# EAGLE board Syn-ArduinoShield-v1a (EAGLE 5.10)
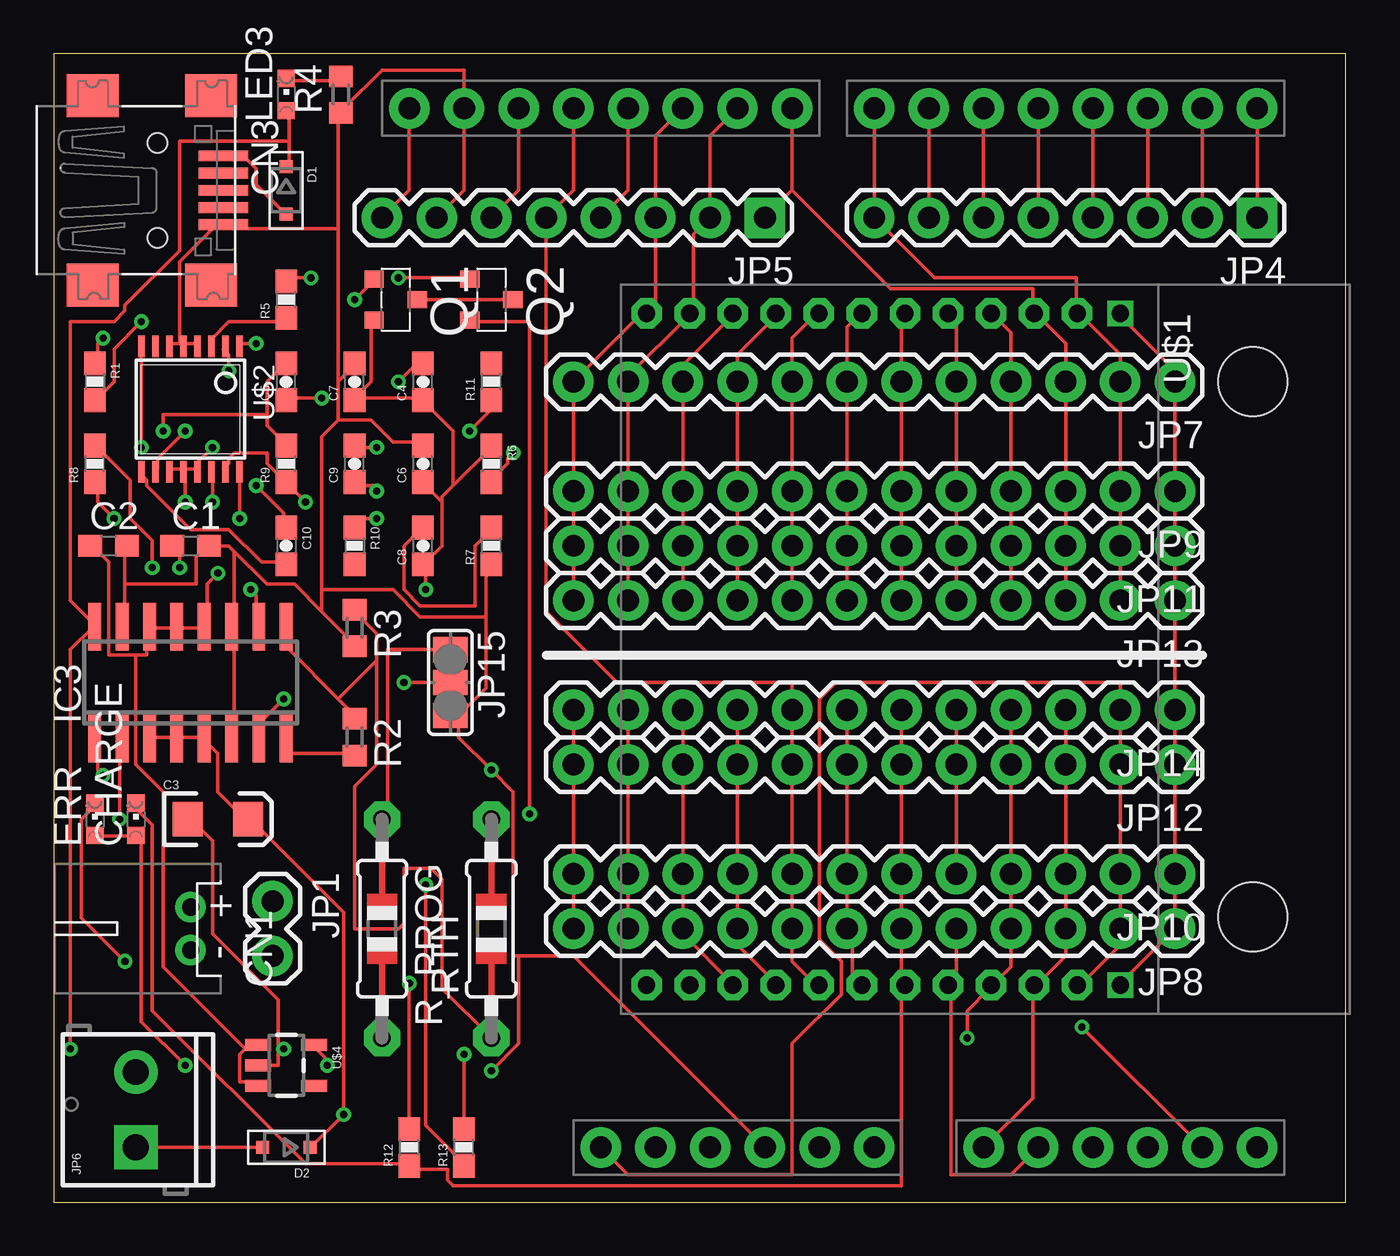
[diagram p0: board, top side]
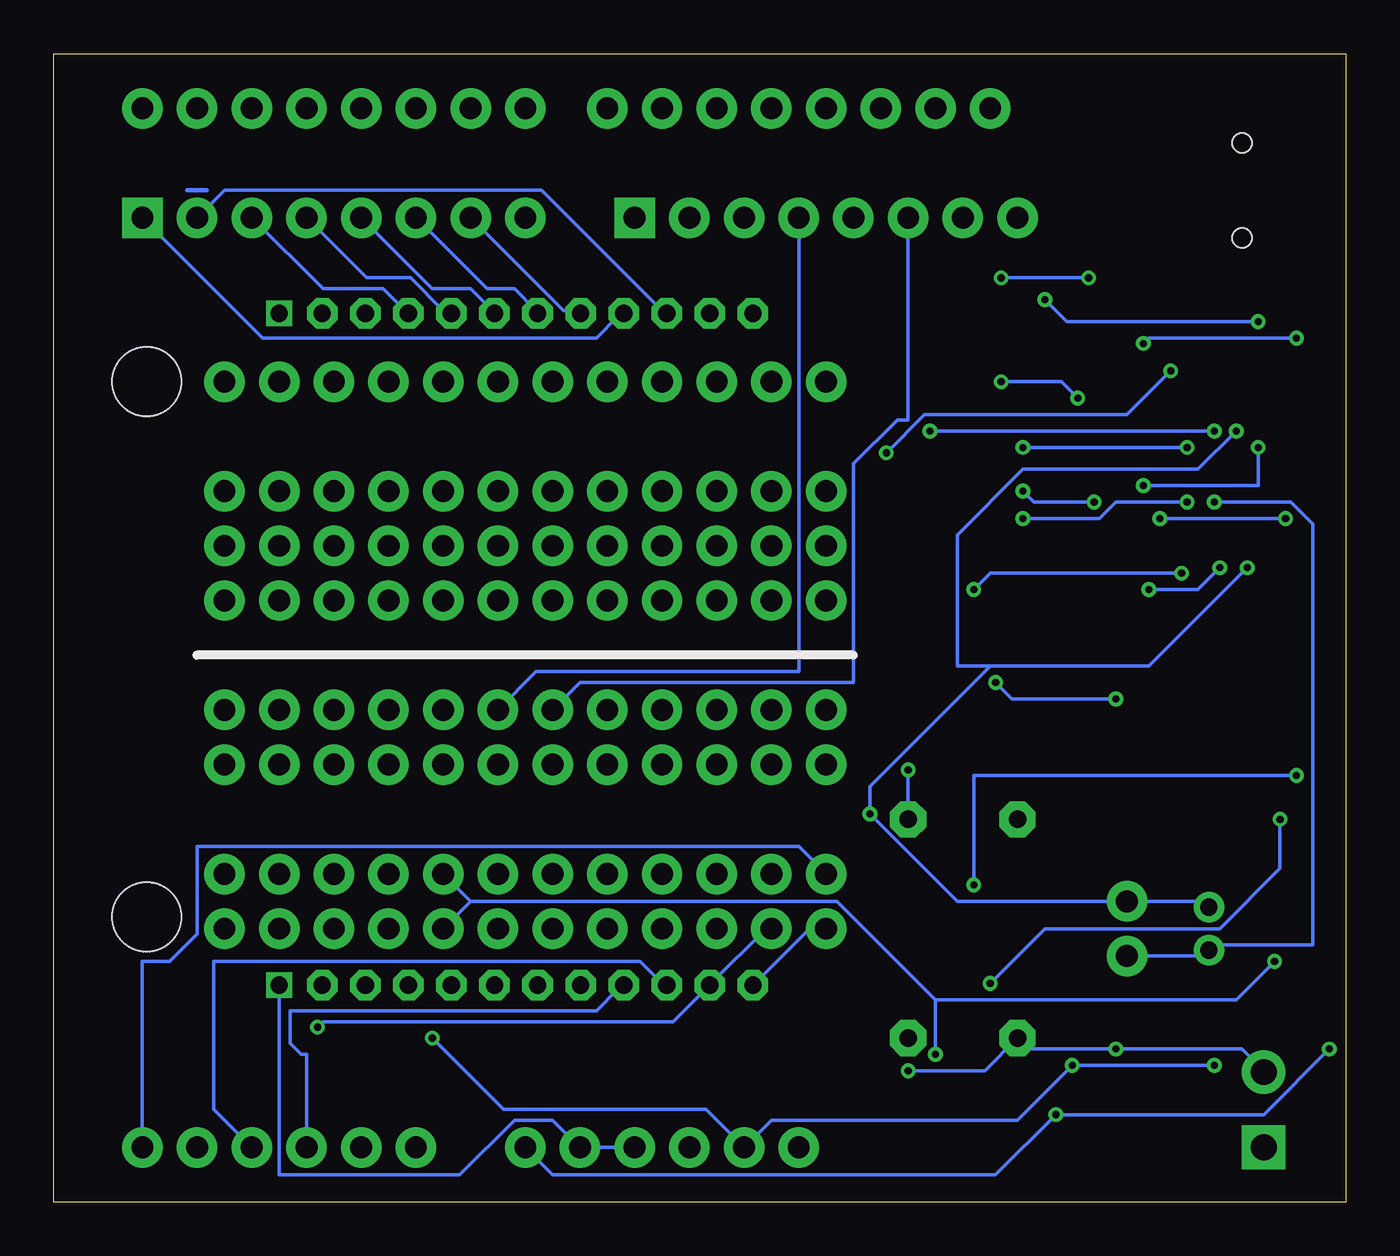
[diagram p1: board, bottom side, seen from below]

Size 59.99 x 53.33 mm. Coordinates in mm from the lower left corner, seen from the top.
Outline: 0,0 59.99,0 59.99,53.33 0,53.33 0,0
Copper layers (1*16): Top 0.0356mm / dielectric 1.5011mm / Bottom 0.0356mm
Design rules "LaenPCBOrder": minimum track width 6mil, minimum drill 13mil, track to track 6mil, track to pad 6mil, pad to pad 6mil, via to via 6mil, smd to smd 6mil, copper to edge 15mil, drill to drill 6mil, minimum pad ring 7mil, minimum via ring 7mil, stop-mask expansion 4mil, vias tented up to drill 0mil, thermal gap 10mil

## Footprints (pad centres in the part's own frame; a part is rotated, then mirrored left to right if it is on the bottom)
C0603 = smd 1.1 x 1: 1 -0.85,0; 2 0.85,0
EIA3216 = smd 1.4 x 1.6: A 1.4,0; C -1.4,0
0603-CAP = smd 1.1 x 1: 1 -0.85,0; 2 0.85,0
CHIPLED_0603 = smd 0.8 x 0.8: A 0,-0.75; C 0,0.75
JST-PH-2-THM-RA = drill 0.8 pad 1.422 round: 1 1,0; 2 -1,0
USB-MINIB = smd 0.5 x 2.308: D+ 0,4.064; D- -0.8,4.064; GND 1.6,4.064; ID 0.8,4.064; VBUS -1.6,4.064 | smd 2 x 2.4: GND1 -4.4,-2; GND2 -4.4,3.5; GND3 4.4,3.5; GND4 4.4,-2 | hole 0.9: -2.2,1; 2.2,1
SOD-323 = smd 0.6 x 0.6: A 1.1,0; C -1.1,0
SO16 = smd 0.6 x 2.2: 1 -4.445,-2.6; 2 -3.175,-2.6; 3 -1.905,-2.6; 4 -0.635,-2.6; 5 0.635,-2.6; 6 1.905,-2.6; 7 3.175,-2.6; 8 4.445,-2.6; 9 4.445,2.6; 10 3.175,2.6; 11 1.905,2.6; 12 0.635,2.6; 13 -0.635,2.6; 14 -1.905,2.6; 15 -3.175,2.6; 16 -4.445,2.6
1X02 = drill 1.016 pad 1.88 round: 1 0,0; 2 2.54,0
1X08 = drill 1.016 pad 1.88 square: 1 0,0 | drill 1.016 pad 1.88 round: 2 2.54,0; 3 5.08,0; 4 7.62,0; 5 10.16,0; 6 12.7,0; 7 15.24,0; 8 17.78,0
SCREWTERMINAL-3.5MM-2 = drill 1.2 pad 2.032 square: 1 0,0 | drill 1.2 pad 2.032 round: 2 3.5,0
1X12 = drill 1.016 pad 1.88 round: 1 0,0; 2 2.54,0; 3 5.08,0; 4 7.62,0; 5 10.16,0; 6 12.7,0; 7 15.24,0; 8 17.78,0; 9 20.32,0; 10 22.86,0; 11 25.4,0; 12 27.94,0
SJ_2 = smd 1.168 x 1.6: 1 -1.524,0; 2 0,0; 3 1.524,0
MICRO3 = smd 0.8 x 0.9: 1 -0.95,-1; 2 0.95,-1; 3 0,1
0603-RES = smd 1.1 x 1: 1 -0.85,0; 2 0.85,0
R0603 = smd 1 x 1.1: 1 -0.85,0; 2 0.85,0
0805-THM = drill 0.813 pad 1.676 octagon: 1 -5.08,0; 2 5.08,0
DUEMILANOVE_VIAS = drill 1.016 pad 1.88 round: 3.3V 50.8,13.97; 5V 50.8,16.51; A0 50.8,29.21; A1 50.8,31.75; A2 50.8,34.29; A3 50.8,36.83; A4 50.8,39.37; A5 50.8,41.91; AREF 2.54,2.54; D2 2.54,36.83; D3 2.54,34.29; D4 2.54,31.75; D5 2.54,29.21; D6 2.54,26.67; D7 2.54,24.13; D8 2.54,20.32; D9 2.54,17.78; D10 2.54,15.24; D11 2.54,12.7; D12 2.54,10.16; D13 2.54,7.62; GND@0 50.8,19.05; GND@1 50.8,21.59; GND@2 2.54,5.08; RES 50.8,11.43; RX 2.54,41.91; TX 2.54,39.37; VIN 50.8,24.13
SYNAPSERF100 = drill 0.8 square: 1 0,0; 24 31.2,0 | drill 0.8 pad 1.422 octagon: 2 0,-2; 3 0,-4; 4 0,-6; 5 0,-8; 6 0,-10; 7 0,-12; 8 0,-14; 9 0,-16; 10 0,-18; 11 0,-20; 12 0,-22; 13 31.2,-22; 14 31.2,-20; 15 31.2,-18; 16 31.2,-16; 17 31.2,-14; 18 31.2,-12; 19 31.2,-10; 20 31.2,-8; 21 31.2,-6; 22 31.2,-4; 23 31.2,-2 | hole 3.2: 3.17,6.16; 28.03,6.16
DS2764 = smd 0.305 x 0.991: CC -2.275,-2.918; DC -0.975,-2.918; IS1 2.275,2.918; IS2 2.275,-2.918; PLS -1.625,-2.918; PS 1.625,-2.918; SCL -0.975,2.918; SDA 1.625,2.918; SNS -0.325,-2.918; SNS1 0.325,-2.918; SNS2 0.975,-2.918; VDD -1.625,2.918; VIN -2.275,2.918; VSS -0.325,2.918; VSS1 0.325,2.918; VSS2 0.975,2.918
SOT23-5 = smd 0.55 x 1.2: 1 -0.95,-1.3; 2 0,-1.3; 3 0.95,-1.3; 4 0.95,1.3; 5 -0.95,1.3

## Placement (x,y rotation side)
C1  0.47uF  [C0603]  6.35,30.48 0 top
C2  10uF  [C0603]  2.54,30.48 0 top
C3  10uF  [EIA3216]  7.62,17.78 0 top
C4  1000pF  [0603-CAP]  17.14,38.1 90 top
C5  1000pF  [0603-CAP]  10.79,38.1 90 top
C6  1000pF  [0603-CAP]  17.14,34.29 90 top
C7  1uF  [0603-CAP]  13.97,38.1 90 top
C8  4.7uF  [0603-CAP]  17.14,30.48 90 top
C9  0.1uF  [0603-CAP]  13.97,34.29 90 top
C10  0.1uF  [0603-CAP]  10.79,30.48 270 top
CHARGE  ORG  [CHIPLED_0603]  3.81,17.78 0 top
CN1  [JST-PH-2-THM-RA]  6.35,12.7 90 top
CN3  [USB-MINIB]  3.81,46.99 270 top
D1  [SOD-323]  10.79,46.99 270 top
D2  [SOD-323]  10.79,2.54 180 top
ERR  RED  [CHIPLED_0603]  1.91,17.78 0 top
IC3  [SO16]  6.35,24.13 0 top
JP1  [1X02]  10.16,13.97 270 top
JP4  [1X08]  55.88,45.72 180 top
JP5  [1X08]  33.02,45.72 180 top
JP6  [SCREWTERMINAL-3.5MM-2]  3.81,2.54 90 top
JP7  M12PTH  [1X12]  52.07,38.1 180 top
JP8  M12PTH  [1X12]  52.07,12.7 180 top
JP9  M12PTH  [1X12]  52.07,33.02 180 top
JP10  M12PTH  [1X12]  52.07,15.24 180 top
JP11  M12PTH  [1X12]  52.07,30.48 180 top
JP12  M12PTH  [1X12]  52.07,20.32 180 top
JP13  M12PTH  [1X12]  52.07,27.94 180 top
JP14  M12PTH  [1X12]  52.07,22.86 180 top
JP15  [SJ_2]  18.41,24.13 270 top
LED3  [CHIPLED_0603]  10.79,51.44 0 top
Q1  IRLML6401  [MICRO3]  15.88,41.91 270 top
Q2  IRLML6401  [MICRO3]  20.32,41.91 270 top
R1  1K  [0603-RES]  1.91,38.1 270 top
R2  6.19K  [R0603]  13.97,21.59 270 top
R3  7.3K  [R0603]  13.97,26.67 270 top
R4  1K  [R0603]  13.34,51.44 90 top
R5  1K  [0603-RES]  10.79,41.91 90 top
R6  150  [0603-RES]  20.32,34.29 270 top
R7  1  [0603-RES]  20.32,30.48 90 top
R8  [0603-RES]  1.91,34.29 90 top
R9  [0603-RES]  10.79,34.29 90 top
R10  150  [0603-RES]  13.97,30.48 270 top
R11  150  [0603-RES]  20.32,38.1 90 top
R12  330  [0603-RES]  16.51,2.54 90 top
R13  330  [0603-RES]  19.05,2.54 90 top
R_PROG  [0805-THM]  15.24,12.7 270 top
RTH  10K @ 25degC  [0805-THM]  20.32,12.7 90 top
U1  ARDUINO_SHIELDNO_SILK  [DUEMILANOVE_VIAS]  13.97,53.34 270 top
U$1  SYNAPSEWIRELESS-RFENGINESTD  [SYNAPSERF100]  49.53,41.27 270 top
U$2  DS2764  [DS2764]  6.35,36.83 180 top
U$4  MCP1802  [SOT23-5]  10.79,6.35 270 top

## Library data of the parts
C1 C2 CHARGE CN1 CN3 D1 D2 ERR IC3 LED3 R2-R4 R_PROG RTH = adafruit
C3-C10 JP1 JP4-JP15 R1 R5-R13 U1 = SparkFun
Q1 Q2 = transistor-power
U$1 = 0_jc-custom
U$2 = ssozonoff
U$4 = 0_jc-modified

## Nets
ADC0: JP8.3 JP10.3 JP12.3 JP14.3 U1.A0 U$1.22
ADC1: ERR.C JP8.5 JP10.5 JP12.5 JP14.5 R13.2 U1.A1 U$1.20
ADC2: JP8.9 JP10.9 JP12.9 JP14.9 U1.A2 U$1.16
ADC3: JP8.10 JP10.10 JP12.10 JP14.10 U1.A3 U$1.15
ADC4: JP8.11 JP10.11 JP12.11 JP14.11 U1.A4 U$1.14
ADC5: JP8.12 JP10.12 JP12.12 JP14.12 U1.A5 U$1.13
AREF: JP5.8 U1.AREF
ARX: JP4.1 JP7.9 JP9.9 JP11.9 JP13.9 U1.RX U$1.9
ATX: JP4.2 JP7.10 JP9.10 JP11.10 JP13.10 U1.TX U$1.10
BAT+: C5.2 CN1.1 JP1.1 Q2.2 R8.2 R9.2
BAT-: C9.2 CN1.2 JP1.2 U$2.VSS U$2.VSS1 U$2.VSS2
D2: JP4.3 JP7.4 JP9.4 JP11.4 JP13.4 U1.D2 U$1.4
D3: JP4.4 JP7.5 JP9.5 JP11.5 JP13.5 U1.D3 U$1.5
D4: JP4.5 JP7.6 JP9.6 JP11.6 JP13.6 U1.D4 U$1.6
D5: JP4.6 JP7.7 JP9.7 JP11.7 JP13.7 U1.D5 U$1.7
D6: JP4.7 JP7.8 JP9.8 JP11.8 JP13.8 U1.D6 U$1.8
D7: JP4.8 JP7.2 JP9.2 JP11.2 JP13.2 U1.D7 U$1.2
D8: JP5.1 JP7.3 JP9.3 JP11.3 JP13.3 U1.D8 U$1.3
D9: JP5.2 JP7.11 JP9.11 JP11.11 JP13.11 U1.D9 U$1.11
D10: JP5.3 JP7.12 JP9.12 JP11.12 JP13.12 U1.D10 U$1.12
D11: CHARGE.C JP5.4 JP8.6 JP10.6 JP12.6 JP14.6 R12.1 U1.D11 U$1.19
D12: JP5.5 JP8.8 JP10.8 JP12.8 JP14.8 U1.D12 U$1.17
D13: JP5.6 JP8.7 JP10.7 JP12.7 JP14.7 U1.D13 U$1.18
GND: C1.2 C2.2 C3.C C6.2 C7.2 CN3.GND IC3.6 IC3.11 IC3.15 JP5.7 JP6.2 JP7.1 JP8.1 JP9.1 JP10.1 JP11.1 JP12.1 JP13.1 JP14.1 JP15.3 R3.2 R4.1 R7.1 R_PROG.2 RTH.2 U1.GND@0 U1.GND@1 U1.GND@2 U$1.1 U$1.24 U$2.SNS U$2.SNS1 U$2.SNS2 U$4.2
I2C_SCL: R10.2
I2C_SDA: R11.2
MPROG: IC3.7 JP15.2
N$1: IC3.1 R13.1
N$2: LED3.C R4.2
N$3: Q1.1 R1.2
N$4: Q2.1 R5.2
N$5: IC3.2 R12.2
N$6: R11.1 U$2.SDA
N$7: IC3.8 R2.2
N$8: IC3.9 R2.1 R3.1 RTH.1
N$9: C1.1 IC3.10
N$10: C4.2 C5.1
N$11: JP15.1 R_PROG.1
N$12: R1.1 U$2.CC
N$14: R5.1 U$2.DC
N$15: C8.2 R7.2
N$16: R8.1 U$2.VIN
N$17: C9.1 R9.1 U$2.VDD
N$18: Q1.3 Q2.3
N$19: C10.1 U$2.IS2
N$20: R10.1 U$2.SCL
N$21: CN3.VBUS D1.A
N$22: C10.2 U$2.IS1
N$24: R6.2 U$2.PLS
N$55: U1.5V
POWER_SWITCH: U$2.PS
RESET: JP8.2 JP10.2 JP12.2 JP14.2 U1.RES U$1.23
VBAT+: C2.1 C4.1 C6.1 C7.1 C8.1 IC3.12 IC3.13 IC3.14 Q1.2 R6.1 U$4.1 U$4.3
VCC3: CHARGE.A ERR.A JP8.4 JP10.4 JP12.4 JP14.4 U1.3.3V U$1.21 U$4.5
VIN: C3.A D1.C D2.C IC3.3 IC3.4 IC3.5 IC3.16 LED3.A U1.VIN
VINJ: D2.A JP6.1

## Tracks (layer width: path | path; a pad name or v marks a point on that pad's centre or on a via)
ADC0
  Top 0.152: JP14.3 JP12.3 JP10.3 JP8.3 46.99,11.43 45.72,10.16 U$1.22 45.47,9.91 45.47,4.83 U1.A0
ADC1  (via drill 0.33)
  Top 0.152: JP8.5 41.91,10.41 41.66,10.16 U$1.20 41.66,9.91 41.66,1.27 44.45,1.27 U1.A1 | JP14.5 JP12.5 JP10.5 | v3.3,11.18 1.27,13.21 1.27,17.78 1.78,18.29 ERR.C | v19.05,6.86 R13.2
  Bottom 0.152: v3.3,11.18 5.08,9.4 19.05,9.4 | 19.05,9.4 23.62,13.97 40.64,13.97 | 40.64,13.97 JP10.5 | 19.05,9.4 v19.05,6.86 | 40.64,13.97 JP8.5
ADC2
  Top 0.152: JP14.9 JP12.9 JP10.9 JP8.9 31.75,11.94 33.53,10.16 U$1.16
  Bottom 0.152: U1.A2 48.26,6.86 48.51,6.86 49.02,7.37 49.02,8.89 34.8,8.89 33.78,9.91 U$1.16
ADC3
  Top 0.152: JP14.10 JP12.10 JP10.10 JP8.10 29.21,12.45 31.5,10.16 U$1.15
  Bottom 0.152: U1.A3 52.58,4.32 52.58,11.18 32.77,11.18 31.75,10.16 U$1.15
ADC4  (via drill 0.33)
  Top 0.152: JP14.11 JP12.11 JP10.11 JP8.11 | v47.75,8.13 U1.A4
  Bottom 0.152: JP8.11 26.92,12.7 29.46,10.16 U$1.14 29.72,9.91 31.24,8.38 47.5,8.38 v47.75,8.13
ADC5
  Top 0.152: JP14.12 JP12.12 JP10.12 JP8.12
  Bottom 0.152: JP8.12 24.89,12.7 27.43,10.16 U$1.13 | U1.A5 55.88,11.18 54.61,11.18 53.34,12.45 53.34,16.51 25.4,16.51 JP10.12
AREF
  Top 0.152: JP5.8 16.51,46.99 U1.AREF
ARX
  Top 0.152: JP4.1 U1.RX | U$1.9 33.53,41.15 31.75,39.37 JP7.9 JP9.9 JP11.9 JP13.9
  Bottom 0.152: JP4.1 50.29,40.13 34.8,40.13 33.78,41.15 U$1.9
ATX
  Top 0.152: JP4.2 U1.TX | U$1.10 31.5,41.15 29.21,38.86 JP7.10 JP9.10 JP11.10 JP13.10
  Bottom 0.152: JP4.2 52.07,46.99 37.34,46.99 31.75,41.4 U$1.10
BAT+  (via drill 0.33)
  Top 0.152: 9.91,36.58 9.91,38.1 10.67,38.86 C5.2 | 9.91,36.58 9.91,36.07 10.67,35.31 R9.2 | v22.1,18.03 22.1,40.89 19.56,40.89 Q2.2 | v4.57,29.46 4.57,30.73 3.56,31.75 3.56,33.53 2.03,35.05 R8.2 | 9.91,36.58 5.08,36.58 v5.08,35.81
  Bottom 0.152: v4.57,29.46 9.14,24.89 16.51,24.89 | 16.51,24.89 22.1,19.3 v22.1,18.03 18.03,13.97 JP1.1 6.6,13.97 6.35,13.72 CN1.1 | v5.08,35.81 6.86,34.04 14.99,34.04 18.03,30.99 18.03,24.89 16.51,24.89
BAT-  (via drill 0.33)
  Top 0.152: 6.1,34.04 5.33,34.04 U$2.VSS2 | 6.1,34.04 6.6,34.04 | 6.1,34.04 U$2.VSS1 6.1,33.78 v6.1,32.51 | v14.99,35.05 13.97,35.05 C9.2 | v7.37,35.05 6.6,34.29 6.6,34.04 | 6.6,34.04 U$2.VSS
  Bottom 0.152: v7.37,35.05 v14.99,35.05 | JP1.2 6.6,11.43 6.35,11.68 CN1.2 6.35,11.94 1.52,11.94 1.52,31.5 2.54,32.51 v6.1,32.51
D2
  Top 0.152: JP4.3 U1.D2 | U$1.4 43.69,41.15 44.45,40.39 JP7.4 JP9.4 JP11.4 JP13.4
  Bottom 0.152: JP4.3 47.5,42.42 44.7,42.42 43.69,41.4 U$1.4
D3
  Top 0.152: JP4.4 U1.D3 | U$1.5 41.66,41.15 41.91,40.89 JP7.5 JP9.5 JP11.5 JP13.5
  Bottom 0.152: JP4.4 45.47,42.93 43.43,42.93 41.91,41.4 41.66,41.4 U$1.5
D4
  Top 0.152: JP4.5 U1.D4 | U$1.6 39.37,41.15 JP7.6 JP9.6 JP11.6 JP13.6
  Bottom 0.152: JP4.5 42.42,42.42 40.64,42.42 39.62,41.4 U$1.6
D5
  Top 0.152: JP4.6 U1.D5 | U$1.7 37.34,41.15 36.83,40.64 JP7.7 JP9.7 JP11.7 JP13.7
  Bottom 0.152: JP4.6 39.88,42.42 38.61,42.42 37.59,41.4 U$1.7
D6
  Top 0.152: JP4.7 U1.D6 | U$1.8 35.31,41.15 34.29,40.13 JP7.8 JP9.8 JP11.8 JP13.8
  Bottom 0.152: JP4.7 36.32,41.4 35.56,41.4 U$1.8
D7
  Top 0.152: U1.D7 JP4.8 40.89,42.93 47.5,42.93 47.5,41.4 U$1.2 47.75,41.15 49.53,39.37 JP7.2 JP9.2 JP11.2 JP13.2
D8
  Top 0.152: 34.29,46.99 JP5.1 | 34.29,46.99 U1.D8 | JP13.3 JP11.3 JP9.3 JP7.3 46.99,39.88 45.72,41.15 U$1.3 45.47,41.4 45.47,42.42 38.86,42.42 34.29,46.99
D9
  Top 0.152: JP13.11 JP11.11 JP9.11 JP7.11 26.67,38.35 29.46,41.15 U$1.11 29.72,41.4 29.72,44.96 JP5.2 30.48,49.53 U1.D9
D10
  Top 0.152: JP13.12 JP11.12 JP9.12 JP7.12 27.43,41.4 U$1.12 27.69,41.4 27.94,41.66 JP5.3 27.94,49.53 U1.D10
D11
  Top 0.152: CHARGE.C 3.81,18.29 4.57,17.53 4.57,8.89 11.68,1.78 16.51,1.78 R12.1 16.51,1.52 18.29,1.52 18.29,1.02 18.54,0.76 39.37,0.76 39.37,9.91 U$1.19 39.37,10.16 JP8.6 JP10.6 JP12.6 JP14.6 | JP5.4 26.67,46.99 U1.D11
  Bottom 0.152: JP5.4 25.4,24.64 37.59,24.64 JP14.6
D12
  Top 0.152: U1.D12 24.13,46.99 JP5.5 22.86,27.43 26.16,24.13 34.29,24.13 JP14.8 JP12.8 JP10.8 JP8.8 34.29,11.18 35.31,10.16 U$1.17
D13
  Top 0.152: JP5.6 21.59,46.99 U1.D13 | JP14.7 JP12.7 JP10.7 JP8.7 37.08,12.45 37.08,10.41 37.34,10.16 U$1.18
  Bottom 0.152: JP5.6 20.32,36.32 20.83,36.32 22.86,34.29 22.86,24.13 35.56,24.13 JP14.7
GND  (via drill 0.33)
  Top 0.152: 5.84,39.88 6.1,39.88 | 5.84,39.88 5.33,39.88 U$2.SNS2 | 6.1,39.88 6.6,39.88 U$2.SNS | 6.1,39.88 U$2.SNS1 | 5.84,39.88 5.84,43.69 7.37,45.21 7.87,45.21 | JP5.7 19.05,46.99 U1.GND@2 19.05,52.58 15.24,52.58 13.46,50.8 R4.1 13.21,50.55 13.21,45.21 | 13.21,45.21 7.87,45.21 | 7.87,45.21 CN3.GND | IC3.6 8.38,21.59 8.38,26.67 IC3.11 8.38,26.92 8.38,30.23 | 13.21,36.32 14.73,36.32 15.75,35.31 17.02,35.31 C6.2 | 13.21,36.32 13.21,38.1 | 13.21,38.1 13.97,38.86 C7.2 | 3.3,28.7 3.3,26.92 IC3.15 | 3.3,28.7 3.3,30.48 C2.2 | 12.45,27.43 11.18,28.7 9.91,28.7 8.38,30.23 | 12.45,27.43 13.97,25.91 R3.2 | 8.38,30.23 8.13,30.48 C1.2 7.11,30.48 6.6,29.97 6.6,28.7 3.3,28.7 | 13.21,36.32 12.45,35.56 12.45,28.45 | 12.45,28.45 12.45,27.43 | 13.21,38.1 13.21,45.21 | U$1.24 49.53,10.16 JP8.1 JP10.1 JP12.1 JP14.1 JP13.1 JP11.1 JP9.1 JP7.1 52.07,38.61 49.53,41.15 U$1.1 | 10.41,7.11 10.41,9.4 7.37,12.45 7.37,16.76 6.35,17.78 C3.C | 10.41,7.11 10.41,6.35 U$4.2 | v10.67,7.11 10.41,7.11 | 20.07,27.18 20.07,23.88 18.8,22.61 | 20.07,27.18 20.07,29.21 20.32,29.46 R7.1 | 18.8,22.61 JP15.3 18.54,22.61 | 18.8,22.61 18.8,21.59 v20.32,20.07 21.34,19.05 21.34,11.43 21.59,11.43 | U1.GND@0 24.13,11.43 21.59,11.43 | v20.32,6.1 21.59,7.37 21.59,11.43 | 12.45,28.45 15.75,28.45 17.02,27.18 20.07,27.18
  Bottom 0.152: JP6.2 3.81,6.1 4.83,7.11 v10.67,7.11 14.73,7.11 R_PROG.2 16.76,6.1 v20.32,6.1 | U1.GND@0 U1.GND@1 36.83,3.81 38.61,3.81 41.15,1.27 49.53,1.27 U$1.24 | v20.32,20.07 RTH.2
MPROG  (via drill 0.33)
  Top 0.152: v10.67,23.37 9.65,22.35 9.65,21.59 IC3.7 | v16.26,24.13 JP15.2
  Bottom 0.152: v16.26,24.13 15.49,23.37 v10.67,23.37
N$1  (via drill 0.33)
  Top 0.152: v17.27,14.73 17.27,3.56 19.05,1.78 R13.1 | v2.29,19.81 2.03,20.07 2.03,21.34 IC3.1
  Bottom 0.152: v17.27,14.73 17.27,19.81 v2.29,19.81
N$2
  Top 0.152: LED3.C 10.92,52.07 13.21,52.07 R4.2
N$3  (via drill 0.33)
  Top 0.152: v13.97,41.91 14.73,42.67 Q1.1 | v4.06,40.89 2.79,39.62 2.79,38.1 2.03,37.34 R1.2
  Bottom 0.152: v13.97,41.91 12.95,40.89 v4.06,40.89
N$4  (via drill 0.33)
  Top 0.152: v16,42.93 19.3,42.93 Q2.1 | v11.94,42.93 10.92,42.93 R5.2
  Bottom 0.152: v11.94,42.93 v16,42.93
N$5  (via drill 0.33)
  Top 0.152: v3.05,17.78 3.05,21.34 IC3.2 | R12.2 v16.51,10.16
  Bottom 0.152: v16.51,10.16 13.97,12.7 5.84,12.7 3.05,15.49 v3.05,17.78
N$6  (via drill 0.33)
  Top 0.152: v6.1,35.81 4.83,34.54 4.83,34.04 U$2.SDA | v19.3,35.81 20.32,36.83 R11.1
  Bottom 0.152: v6.1,35.81 v19.3,35.81
N$7
  Top 0.152: R2.2 13.97,20.83 10.92,20.83 10.92,21.34 IC3.8
N$8
  Top 0.152: 13.21,23.37 10.92,25.65 10.92,26.67 IC3.9 | 13.21,23.37 13.97,22.61 R2.1 | 14.99,25.15 14.99,26.42 13.97,27.43 R3.1 | 14.99,25.15 13.21,23.37 | RTH.1 18.03,9.91 18.03,14.99 17.53,15.49 16.26,15.49 16.26,12.95 16,12.7 13.97,12.7 13.97,19.3 14.99,20.32 14.99,25.15
N$9  (via drill 0.33)
  Top 0.152: v5.84,29.46 5.84,30.23 5.59,30.48 C1.1 | v9.14,28.45 9.4,28.19 9.4,26.92 IC3.10
  Bottom 0.152: v5.84,29.46 6.86,28.45 v9.14,28.45
N$10  (via drill 0.33)
  Top 0.152: v12.45,37.34 10.92,37.34 C5.1 | v16,38.1 17.02,39.12 C4.2
  Bottom 0.152: v12.45,37.34 13.21,38.1 v16,38.1
N$11
  Top 0.152: R_PROG.1 15.49,18.03 15.49,25.65 JP15.1
N$12  (via drill 0.33)
  Top 0.152: v9.4,39.88 8.64,39.88 U$2.CC | v2.29,40.13 2.03,39.88 2.03,39.12 R1.1
  Bottom 0.152: v9.4,39.88 9.14,40.13 v2.29,40.13
N$14
  Top 0.152: U$2.DC 7.37,39.88 7.37,40.13 8.13,40.89 10.67,40.89 R5.1
N$15
  Top 0.152: C8.2 17.02,31.24 16.26,30.48 16.26,28.45 17.02,27.69 19.56,27.69 19.56,30.48 20.32,31.24 R7.2
N$16  (via drill 0.33)
  Top 0.152: v8.64,31.75 8.64,33.78 U$2.VIN | v2.79,31.75 2.03,32.51 2.03,33.27 R8.1
  Bottom 0.152: v2.79,31.75 v8.64,31.75
N$17  (via drill 0.33)
  Top 0.152: U$2.VDD 7.87,34.04 8.13,34.29 8.13,34.54 8.38,34.8 9.91,34.8 9.91,34.29 10.67,33.53 R9.1 10.92,33.27 v11.68,32.51 | v14.99,33.02 14.99,33.27 13.97,33.27 C9.1
  Bottom 0.152: v14.99,33.02 14.48,32.51 v11.68,32.51
N$18
  Top 0.152: Q1.3 Q2.3
N$19  (via drill 0.33)
  Top 0.152: v4.06,35.05 4.06,39.62 U$2.IS2 | v9.4,33.27 10.67,32 10.67,31.5 C10.1
  Bottom 0.152: v4.06,35.05 4.06,33.27 v9.4,33.27
N$20  (via drill 0.33)
  Top 0.152: v7.37,32.51 7.37,33.78 U$2.SCL | v14.99,31.75 13.97,31.75 R10.1
  Bottom 0.152: v7.37,32.51 10.67,32.51 11.43,31.75 v14.99,31.75
N$21
  Top 0.152: D1.A 10.67,45.97 9.4,47.24 9.4,48.01 8.89,48.51 7.87,48.51 CN3.VBUS
N$22
  Top 0.152: U$2.IS1 4.06,33.78 4.32,33.53 4.32,33.27 6.35,31.24 8.13,31.24 9.65,29.72 10.67,29.72 C10.2
N$23
  Bottom 0.203: 52.89,46.99 53.79,46.99
N$24  (via drill 0.33)
  Top 0.152: v8.13,38.61 8.13,39.37 7.87,39.62 U$2.PLS | v21.34,34.8 21.08,34.54 21.08,34.29 20.32,33.53 R6.2
  Bottom 0.152: v8.13,38.61 10.16,36.58 19.56,36.58 v21.34,34.8
RESET
  Top 0.152: U$1.23 47.75,10.16 49.53,11.94 JP8.2 JP10.2 JP12.2 JP14.2 49.53,24.13 36.32,24.13 35.56,23.37 35.56,12.19 36.58,11.18 36.58,9.65 34.29,7.37 34.29,1.27 26.67,1.27 U1.RES
VBAT+  (via drill 0.33)
  Top 0.152: 13.97,37.34 14.73,38.1 14.73,40.89 Q1.2 | 13.97,37.34 17.02,37.34 C4.1 17.27,37.08 18.54,35.81 18.54,33.27 | 13.97,37.34 C7.1 | 18.03,32.51 18.03,30.48 17.27,29.72 C8.1 17.27,29.46 v17.27,28.45 | 18.03,32.51 17.27,33.27 C6.1 | 18.54,33.27 18.03,32.77 18.03,32.51 | 18.54,33.27 20.32,35.05 R6.1 | 8.89,7.11 8.64,6.86 8.64,5.59 9.4,5.59 U$4.3 | 8.89,7.11 9.4,7.11 U$4.1 | 3.81,25.4 4.32,25.4 4.32,26.67 IC3.14 4.57,26.67 5.59,26.67 IC3.13 5.84,26.67 6.86,26.67 IC3.12 7.11,26.92 7.11,28.7 v7.62,29.21 | 3.81,25.4 2.54,25.4 2.54,29.72 1.78,30.48 C2.1 | 8.89,7.11 5.08,10.92 5.08,19.05 3.81,20.32 3.81,25.4
  Bottom 0.152: v17.27,28.45 16.51,29.21 v7.62,29.21
VCC3  (via drill 0.33)
  Top 0.152: JP14.4 JP12.4 JP10.4 JP8.4 44.45,10.92 43.69,10.16 U$1.21 43.43,9.91 42.42,8.89 v42.42,7.62 | 3.81,17.02 2.03,17.02 ERR.A | v12.7,6.35 12.7,6.6 12.19,7.11 U$4.5 | 3.81,17.02 4.06,16.76 4.06,8.38 v6.1,6.35 | 3.81,17.02 CHARGE.A
  Bottom 0.152: v6.1,6.35 v12.7,6.35 15.24,3.81 26.67,3.81 U1.3.3V 29.72,4.32 39.12,4.32 v42.42,7.62
VIN  (via drill 0.33)
  Top 0.152: 10.92,49.28 10.92,50.55 LED3.A | 10.92,49.28 10.92,48.26 D1.C | 10.92,49.28 5.84,49.28 5.84,44.2 3.3,41.66 3.3,41.4 2.79,40.89 0.76,40.89 0.76,27.94 1.78,26.92 IC3.16 1.78,26.67 0.76,25.65 v0.76,7.11 | IC3.3 4.57,21.59 5.59,21.59 IC3.4 5.84,21.59 6.86,21.59 IC3.5 7.11,21.34 7.62,20.83 7.62,19.05 8.89,17.78 C3.A 9.14,17.78 13.46,13.46 v13.46,4.06 11.94,2.54 D2.C
  Bottom 0.152: U1.VIN 36.83,1.27 16.26,1.27 v13.46,4.06 3.81,4.06 v0.76,7.11
VINJ
  Top 0.152: JP6.1 D2.A